# Altium PCB PC104adapter.PcbDoc
Units mm, origin at the board's own origin, x right, y up, seen from the top; angles counter-clockwise.
Board outline 13.42 x 81.41 mm, 2 copper layers (Top Layer, Bottom Layer), stack 1.571 mm thick; 2 components, 19 nets, 106 pads, 0 vias.
Unrouted connection lines stored in the file: 3.
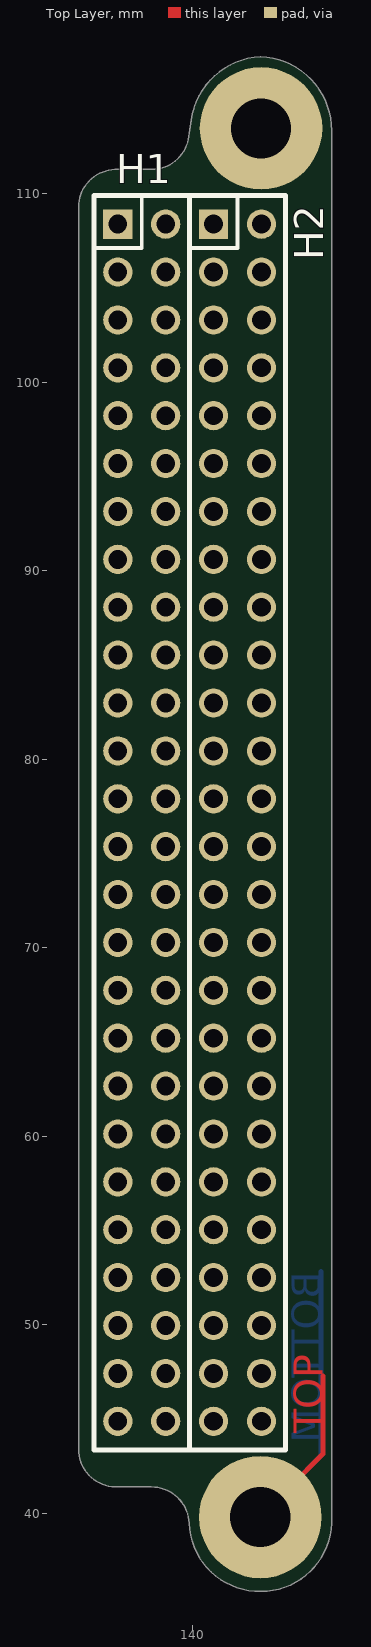
[diagram p0: Top Layer view]
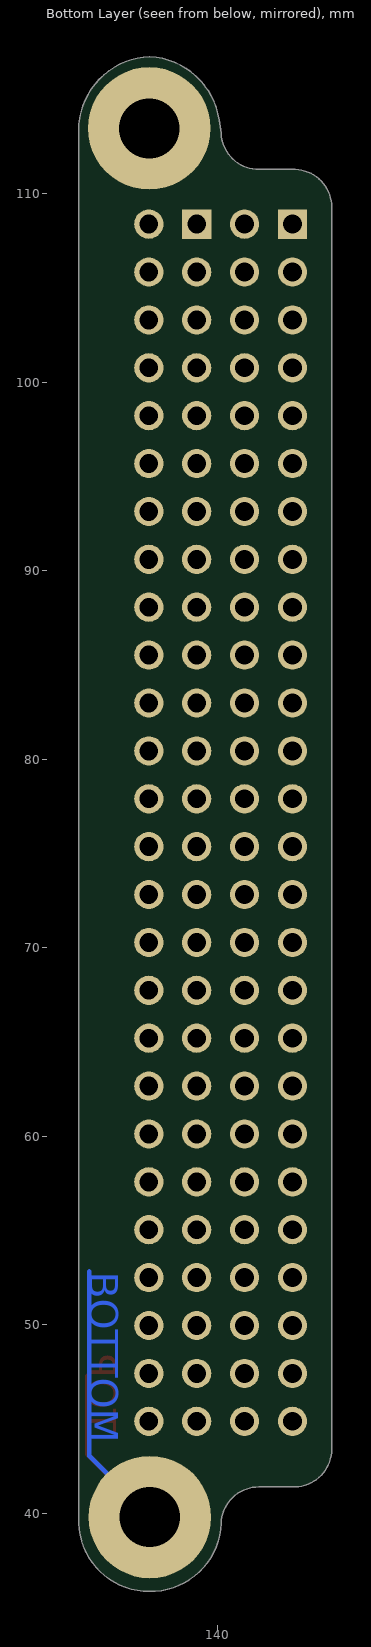
[diagram p1: Bottom Layer view, seen from below]

## Layer stack, top to bottom
Top Layer: signal copper 0.0356
Dielectric 1: core 1.5, FR-4, Dk 4.2
Bottom Layer: signal copper 0.0356

## Board outline
133.957,43.408 ccw(c135.957,43.408) 135.879,41.409 137.82,41.409 cw(c137.82,39.409) 139.819,39.487 ccw(c143.567,39.617) 143.633,35.867 ccw(c143.633,39.617) 147.381,39.487 147.381,113.348 ccw(c143.447,113.348) 143.601,117.279 143.601,117.276 ccw(c143.819,113.348) 139.926,113.916 139.819,113.214 cw(c137.82,113.292) 137.82,111.292 135.879,111.292 ccw(c135.957,109.294) 133.957,109.294

## Design rules (kind name [scope] priority, off if disabled: settings)
Clearance [All] p1: gap=0.208 ignorepadtopadclearanceinfootprint=FALSE except(0: Arc-Hole Track-Hole SMDPad-Hole THPad-Hole Via-Hole Fill-Hole Poly-Hole Region-Hole Text-Hole)
ComponentClearance ComponentClearance_1 [InComponent('H1') vs InComponent('H2')] p1: gap=-100 collisioncheckmode=3 verticalgap=-100 showdistances=FALSE
ComponentClearance [All] p2: gap=0.254 collisioncheckmode=3 verticalgap=0.254 showdistances=FALSE
PolygonConnect [All] p1: connectstyle=Relief reliefconductorwidth=0.254 reliefentries=4 polygonreliefangle="90 Angle" airgapwidth=0.254
RoutingVias [All] p1: holewidth=0.711 width=1.27 viastyle="Through Hole" minholewidth=0.711 minwidth=1.27 maxholewidth=0.711 maxwidth=1.27
SolderMaskExpansion [All] p1: expansion=0.102
Width [All] p1: maxlimit=4 minlimit=0.208 preferedwidth=0.254 minimp=50.000000 maximp=50.000000 favimp=50.000000
29 further rules are at their usual default settings.

## Classes and differential pairs
net class CS[2..1]: CS1 CS2
channel class BatPak_sensor: sensor1 sensor2

## Components (designator, comment, footprint, x,y, rotation, side; value= is the part's Value field where it differs from the comment)
H1 "Samtec Header ESQ-126-xx-x-D" Samtec_ESQ-126-39-G-D 136.037,108.391 r270 top locked
H2 "Samtec Header ESQ-126-xx-x-D" Samtec_ESQ-126-39-G-D 141.117,108.391 r270 top locked

## Footprints (in the part's own frame and the unit in brackets; to place one, negate y for a bottom-side part, rotate by r counter-clockwise, add the part's x,y. Pads: shape width x height; smd on the part's side, far side on the other; paste and mask are expansions set on the pad)
Samtec_ESQ-126-39-G-D [mm] "Samtec ESQ Series Header. ESQ-126-39-G-D. PC-104 Stack."
  rect 1.55x1.55 hole 1: 1(0,0)
  round 1.55 hole 1: 2(0,2.54) 3(2.54,0) 4(2.54,2.54) 5(5.08,0) 6(5.08,2.54) 7(7.62,0) 8(7.62,2.54) 9(10.16,0) 10(10.16,2.54) 11(12.7,0) 12(12.7,2.54) 13(15.24,0) 14(15.24,2.54) 15(17.78,0) 16(17.78,2.54) 17(20.32,0) 18(20.32,2.54) 19(22.86,0) 20(22.86,2.54) 21(25.4,0) 22(25.4,2.54) 23(27.94,0) 24(27.94,2.54) 25(30.48,0) 26(30.48,2.54) 27(33.02,0) 28(33.02,2.54) 29(35.56,0) 30(35.56,2.54) 31(38.1,0) 32(38.1,2.54) 33(40.64,0) 34(40.64,2.54) 35(43.18,0) 36(43.18,2.54) 37(45.72,0) 38(45.72,2.54) 39(48.26,0) 40(48.26,2.54) 41(50.8,0) 42(50.8,2.54) 43(53.34,0) 44(53.34,2.54) 45(55.88,0) 46(55.88,2.54) 47(58.42,0) 48(58.42,2.54) 49(60.96,0) 50(60.96,2.54) 51(63.5,0) 52(63.5,2.54)
  silkscreen extent -1.52,-1.27 65.02,3.81, body extent -1.52,-1.27 65.02,3.81, height 11.05

## Part data
H1 H2: library part Samtec_ESQ-126-xx-x-D, "Samtec ESQ Series Header , 2.54mm pitch, 2x26pin. PC-104 Stack Connector.", HelpUrl=http://suddendocs.samtec.com/catalog_english/esq_th.pdf

## Free pads (board coordinates)
  round 6.5 hole 3.2: 1(143.6,39.809) 1(143.633,113.469)

## Nets (pads, with @x,y where several pads share a name; then routed paths per layer and width w, separated by ;. In a path a pad name is that pad's centre, name@x,y a point inside that pad or via, vN(x,y) a via of type N, cw(c..) or ccw(c..) an arc to the next point about the centre after c; other vN are vias at no path point)
CONTROL: 
CS1: 
CS2: 
GND: 
HGND: H2.29 H2.30 H2.32
NetB1_0: 
NetB1_1: 
NetB3_1: 
NetC1_sensor1_2: 
NetP1_9: 
NetQ1_D: 
NetQ1_G: 
NetQ1_S: 
NetQ2_B: 
NetQ2_C: 
NetR1_heat_2: 
SCK: 
V_BAT: 
V_HTR: H2.45 H2.46
pads on no net: H1.1 H1.2 H1.3 H1.4 H1.5 H1.6 H1.7 H1.8 H1.9 H1.10 H1.11 H1.12 H1.13 H1.14 H1.15 H1.16 H1.17 H1.18 H1.19 H1.20 H1.21 H1.22 H1.23 H1.24 H1.25 H1.26 H1.27 H1.28 H1.29 H1.30 H1.31 H1.32 H1.33 H1.34 H1.35 H1.36 H1.37 H1.38 H1.39 H1.40 H1.41 H1.42 H1.43 H1.44 H1.45 H1.46 H1.47 H1.48 H1.49 H1.50 H1.51 H1.52 H2.1 H2.2 H2.3 H2.4 H2.5 H2.6 H2.7 H2.8 H2.9 H2.10 H2.11 H2.12 H2.13 H2.14 H2.15 H2.16 H2.17 H2.18 H2.19 H2.20 H2.21 H2.22 H2.23 H2.24 H2.25 H2.26 H2.27 H2.28 H2.31 H2.33 H2.34 H2.35 H2.36 H2.37 H2.38 H2.39 H2.40 H2.41 H2.42 H2.43 H2.44 H2.47 H2.48 H2.49 H2.50 H2.51 H2.52
copper on no net: | length 20.2
  Top Layer w0.254: 145.212,41.453 146.914,43.155 146.914,47.295
  Bottom Layer w0.254: 144.094,40.335 146.812,43.053 146.812,52.832

## Other copper
Top Layer:
  text "TOP" at 146.914,44.247 h1.52 r90
Bottom Layer:
  text "BOTTOM" at 146.812,52.832 h1.52 r90

## Silkscreen, mask and mechanical layers (free items; w line width, h text height)
Mechanical 1:
  lines w0.1: 143.601,117.276 ccw(c143.819,113.348) 139.926,113.916 139.819,113.214 cw(c137.82,113.292) 137.82,111.292 135.879,111.292 ccw(c135.957,109.294) 133.957,109.294 133.957,43.408 ccw(c135.957,43.408) 135.879,41.409 137.82,41.409 cw(c137.82,39.409) 139.819,39.487 ccw(c143.567,39.617) 143.633,35.867 ; 143.601,117.279 cw(c143.447,113.348) 147.381,113.348 147.381,39.487 cw(c143.633,39.617) 143.633,35.867